# EAGLE board kostka-panel (EAGLE 9.2.2)
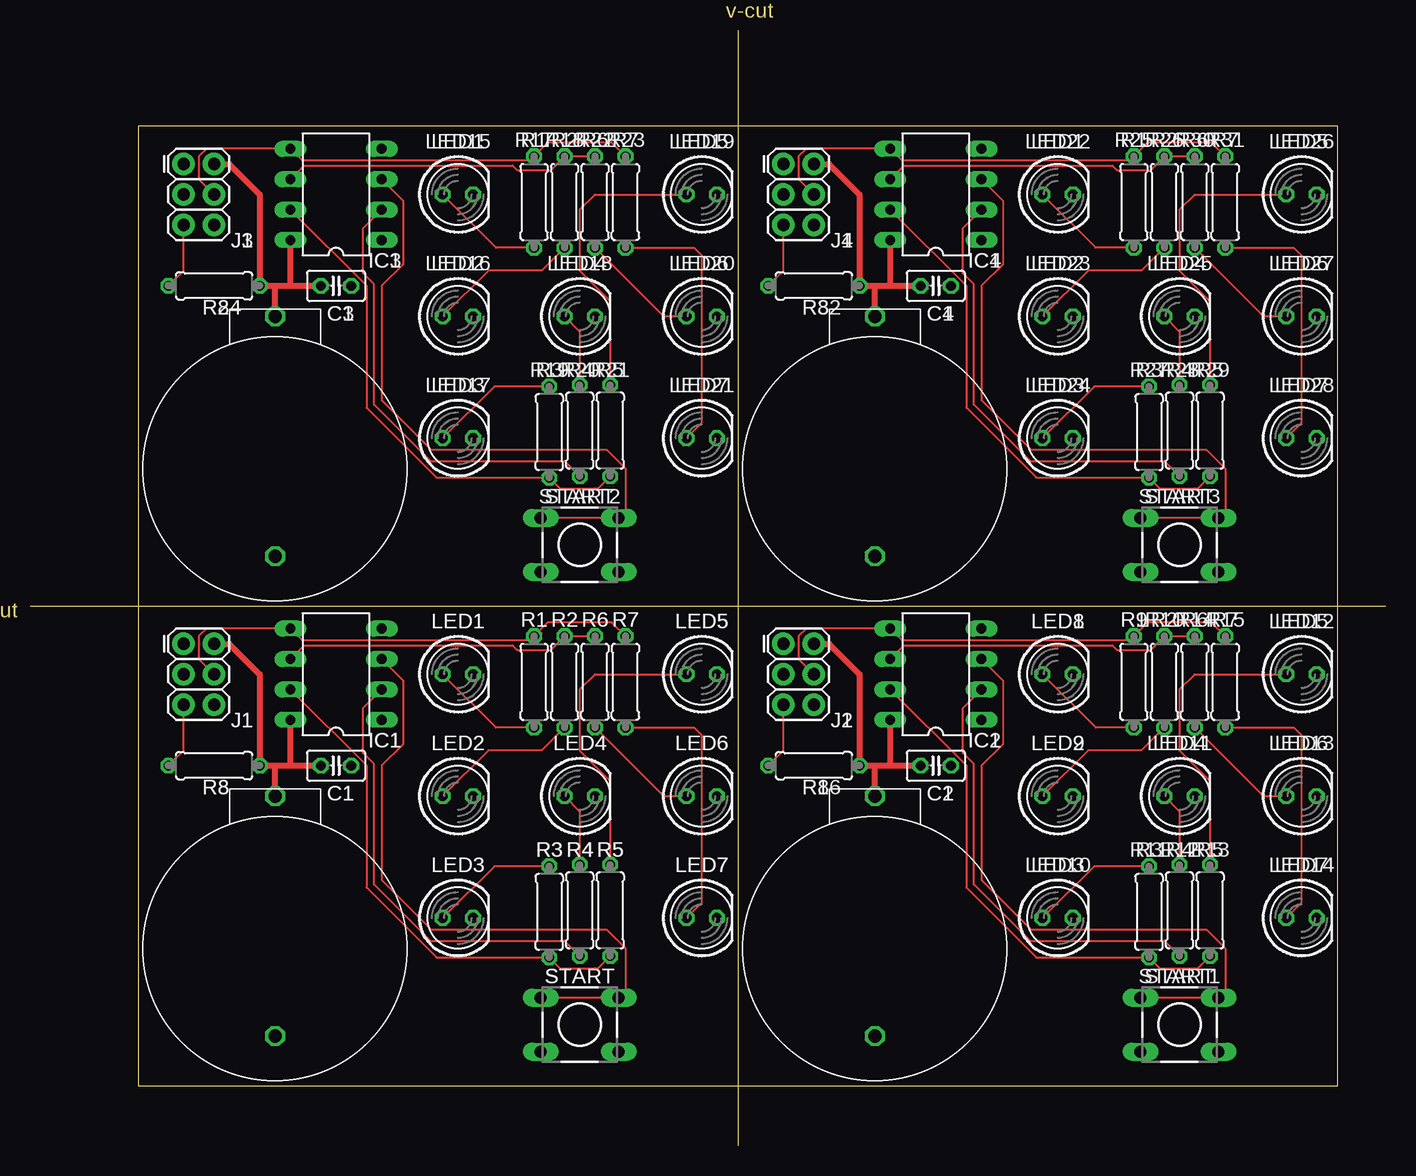
[diagram p0: board, top side]
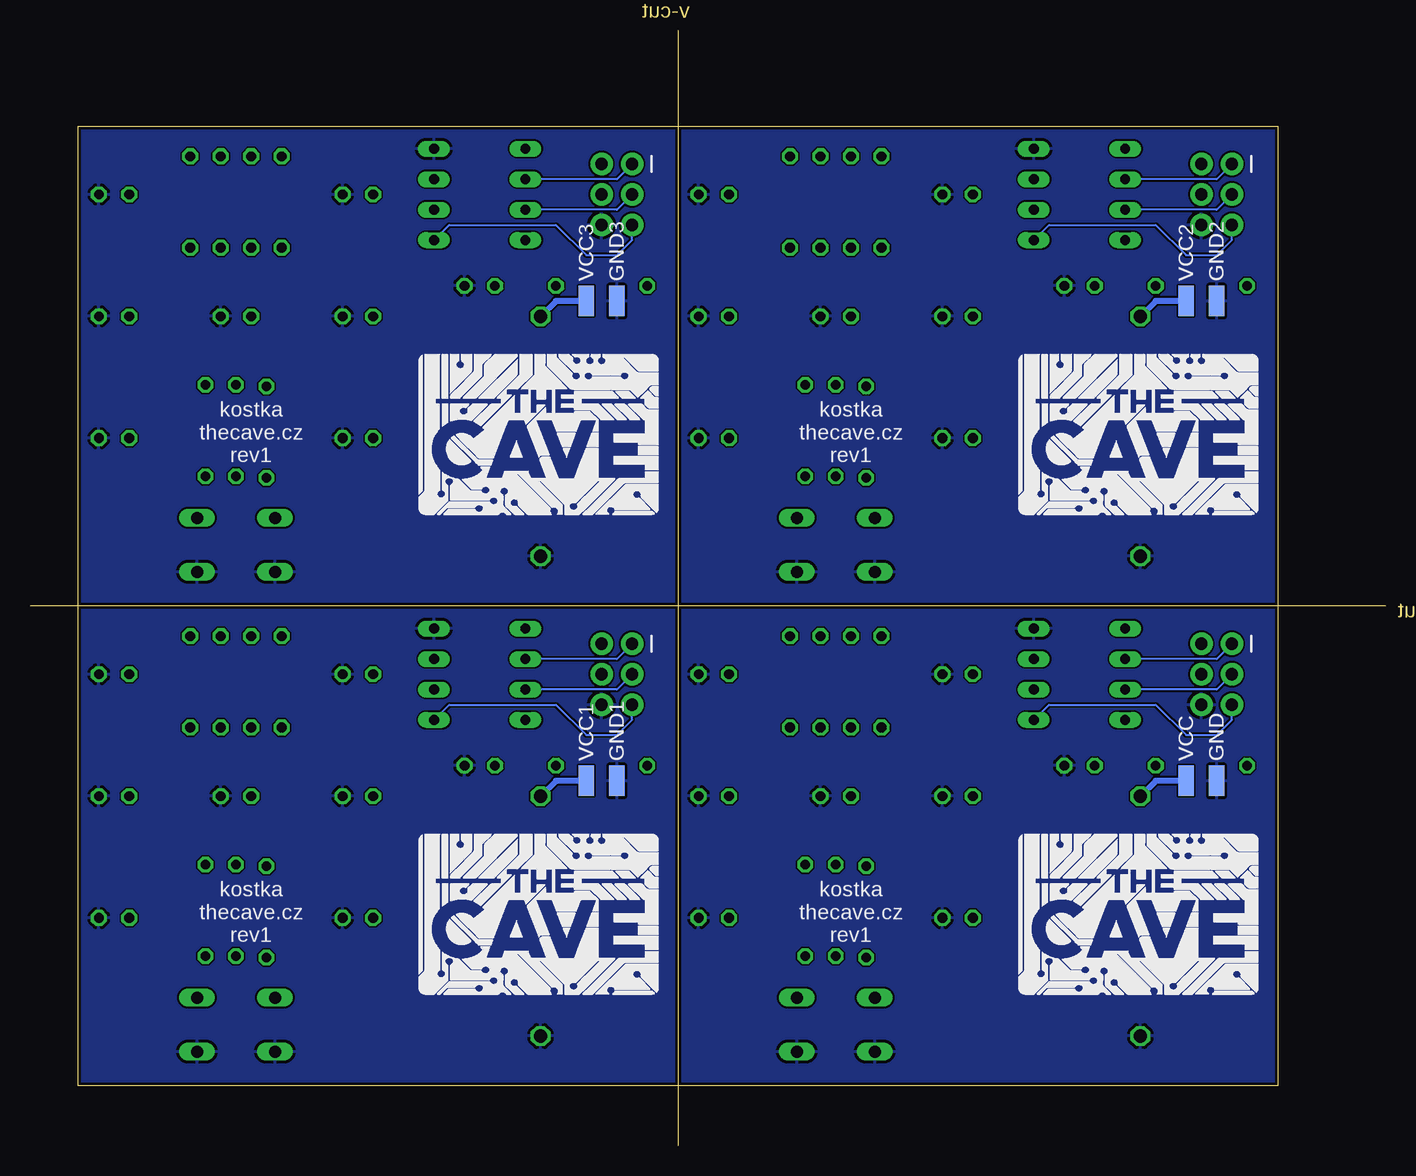
[diagram p1: board, bottom side, seen from below]

Size 113 x 93 mm. Coordinates in mm from the lower left corner, seen from the top.
Outline: 0,45 113,45
Outline: 59,93 59,0
Outline: 9,5 109,5 109,85 9,85 9,5
Copper layers (1*16): Top 0.035mm / dielectric 1.5mm / Bottom 0.035mm
Design rules "SeeedStudio_2layer_DRU_no_angle_20140221": minimum track width 6mil, minimum drill 12mil, track to track 6mil, track to pad 6mil, pad to pad 6mil, via to via 6mil, smd to smd 0mil, copper to edge 10mil, drill to drill 10mil, minimum pad ring 10mil, minimum via ring 6mil, stop-mask expansion 2mil, vias tented up to drill 100mil, thermal gap 10mil

## Footprints (pad centres in the part's own frame; a part is rotated, then mirrored left to right if it is on the bottom)
C025-025X050 = drill 0.813 octagon: 1 -1.27,0; 2 1.27,0
SMD1,27-2,54 = smd 1.27 x 2.54: 1 0,0
DIL08 = drill 0.813 long: 1 -3.81,-3.81; 2 -1.27,-3.81; 3 1.27,-3.81; 4 3.81,-3.81; 5 3.81,3.81; 6 1.27,3.81; 7 -1.27,3.81; 8 -3.81,3.81
2X3 = drill 1.016 pad 1.88: 1 0,0; 2 0,2.54; 3 2.54,0; 4 2.54,2.54; 5 5.08,0; 6 5.08,2.54
LED5MM = drill 0.813 octagon: A -1.27,0; K 1.27,0
0207/7 = drill 0.813 octagon: 1 -3.81,0; 2 3.81,0
DTS-6 = drill 1 long: 1 -3.25,2.25; 2 3.25,2.25; 3 -3.25,-2.25; 4 3.25,-2.25
CR2032HZ = drill 1.1 octagon: MINUS 0,7.3; PLUS 0,-12.7

## Placement (x,y rotation side)
C1  100n  [C025-025X050]  25.51,31.67 0 top
C2  100n  [C025-025X050]  75.51,31.67 0 top
C3  100n  [C025-025X050]  25.51,71.67 0 top
C4  100n  [C025-025X050]  75.51,71.67 0 top
GND  [SMD1,27-2,54]  14.08,30.4 0 bottom
GND1  [SMD1,27-2,54]  64.08,30.4 0 bottom
GND2  [SMD1,27-2,54]  14.08,70.4 0 bottom
GND3  [SMD1,27-2,54]  64.08,70.4 0 bottom
IC1  TINY13-20PU  [DIL08]  25.51,39.29 90 top
IC2  TINY13-20PU  [DIL08]  75.51,39.29 90 top
IC3  TINY13-20PU  [DIL08]  25.51,79.29 90 top
IC4  TINY13-20PU  [DIL08]  75.51,79.29 90 top
J1  AVR_SPI_PROG_3X2PTH  [2X3]  12.81,41.83 270 top
J2  AVR_SPI_PROG_3X2PTH  [2X3]  62.81,41.83 270 top
J3  AVR_SPI_PROG_3X2PTH  [2X3]  12.81,81.83 270 top
J4  AVR_SPI_PROG_3X2PTH  [2X3]  62.81,81.83 270 top
LED1  [LED5MM]  35.67,39.29 0 top
LED2  [LED5MM]  35.67,29.13 0 top
LED3  [LED5MM]  35.67,18.97 0 top
LED4  [LED5MM]  45.83,29.13 0 top
LED5  [LED5MM]  55.99,39.29 0 top
LED6  [LED5MM]  55.99,29.13 0 top
LED7  [LED5MM]  55.99,18.97 0 top
LED8  [LED5MM]  85.67,39.29 0 top
LED9  [LED5MM]  85.67,29.13 0 top
LED10  [LED5MM]  85.67,18.97 0 top
LED11  [LED5MM]  95.83,29.13 0 top
LED12  [LED5MM]  105.99,39.29 0 top
LED13  [LED5MM]  105.99,29.13 0 top
LED14  [LED5MM]  105.99,18.97 0 top
LED15  [LED5MM]  35.67,79.29 0 top
LED16  [LED5MM]  35.67,69.13 0 top
LED17  [LED5MM]  35.67,58.97 0 top
LED18  [LED5MM]  45.83,69.13 0 top
LED19  [LED5MM]  55.99,79.29 0 top
LED20  [LED5MM]  55.99,69.13 0 top
LED21  [LED5MM]  55.99,58.97 0 top
LED22  [LED5MM]  85.67,79.29 0 top
LED23  [LED5MM]  85.67,69.13 0 top
LED24  [LED5MM]  85.67,58.97 0 top
LED25  [LED5MM]  95.83,69.13 0 top
LED26  [LED5MM]  105.99,79.29 0 top
LED27  [LED5MM]  105.99,69.13 0 top
LED28  [LED5MM]  105.99,58.97 0 top
R1  1k  [0207/7]  42.02,38.66 270 top
R2  1k  [0207/7]  44.56,38.66 270 top
R3  1k  [0207/7]  43.29,19.48 90 top
R4  1k  [0207/7]  45.83,19.61 90 top
R5  1k  [0207/7]  48.37,19.61 90 top
R6  1k  [0207/7]  47.1,38.66 270 top
R7  1k  [0207/7]  49.64,38.66 270 top
R8  10k  [0207/7]  15.35,31.67 0 top
R9  1k  [0207/7]  92.02,38.66 270 top
R10  1k  [0207/7]  94.56,38.66 270 top
R11  1k  [0207/7]  93.29,19.48 90 top
R12  1k  [0207/7]  95.83,19.61 90 top
R13  1k  [0207/7]  98.37,19.61 90 top
R14  1k  [0207/7]  97.1,38.66 270 top
R15  1k  [0207/7]  99.64,38.66 270 top
R16  10k  [0207/7]  65.35,31.67 0 top
R17  1k  [0207/7]  42.02,78.66 270 top
R18  1k  [0207/7]  44.56,78.66 270 top
R19  1k  [0207/7]  43.29,59.48 90 top
R20  1k  [0207/7]  45.83,59.6 90 top
R21  1k  [0207/7]  48.37,59.6 90 top
R22  1k  [0207/7]  47.1,78.66 270 top
R23  1k  [0207/7]  49.64,78.66 270 top
R24  10k  [0207/7]  15.35,71.67 0 top
R25  1k  [0207/7]  92.02,78.66 270 top
R26  1k  [0207/7]  94.56,78.66 270 top
R27  1k  [0207/7]  93.29,59.48 90 top
R28  1k  [0207/7]  95.83,59.6 90 top
R29  1k  [0207/7]  98.37,59.6 90 top
R30  1k  [0207/7]  97.1,78.66 270 top
R31  1k  [0207/7]  99.64,78.66 270 top
R32  10k  [0207/7]  65.35,71.67 0 top
START  DTS-6  [DTS-6]  45.83,10.08 0 top
START1  DTS-6  [DTS-6]  95.83,10.08 0 top
START2  DTS-6  [DTS-6]  45.83,50.08 0 top
START3  DTS-6  [DTS-6]  95.83,50.08 0 top
U$1  THECAVE_LOGO_NEW_BOTTOM  [NEW_LOGO_BOTTOM]  10.27,12.62 0 top
U$2  THECAVE_LOGO_NEW_BOTTOM  [NEW_LOGO_BOTTOM]  60.27,12.62 0 top
U$3  THECAVE_LOGO_NEW_BOTTOM  [NEW_LOGO_BOTTOM]  10.27,52.62 0 top
U$4  THECAVE_LOGO_NEW_BOTTOM  [NEW_LOGO_BOTTOM]  60.27,52.62 0 top
VCC  [SMD1,27-2,54]  16.62,30.4 0 bottom
VCC1  [SMD1,27-2,54]  66.62,30.4 0 bottom
VCC2  [SMD1,27-2,54]  16.62,70.4 0 bottom
VCC3  [SMD1,27-2,54]  66.62,70.4 0 bottom
X1  CR2032H_HOLD2  [CR2032HZ]  20.43,16.43 180 top
X2  CR2032H_HOLD2  [CR2032HZ]  70.43,16.43 180 top
X3  CR2032H_HOLD2  [CR2032HZ]  20.43,56.43 180 top
X4  CR2032H_HOLD2  [CR2032HZ]  70.43,56.43 180 top

## Library data of the parts
C1-C4 = rcl; SPICEPREFIX: C
GND GND1-GND3 VCC VCC1-VCC3 = wirepad
IC1-IC4 = atmel; MPN: ATTINY13-20PU; OC_FARNELL: 9171550; OC_NEWARK: 96K6521
J1-J4 = SparkFun-Connectors
LED1-LED28 = led
R1-R32 = rcl; SPICEPREFIX: R
START START1-START3 = switch-tact
U$1-U$4 X1-X4 = thecave

## Nets
GND: C1.2 GND.1 IC1.4 J1.6 LED1.K LED2.K LED3.K LED4.K LED5.K LED6.K LED7.K START.3 START.4 X1.MINUS
GND1: C2.2 GND1.1 IC2.4 J2.6 LED8.K LED9.K LED10.K LED11.K LED12.K LED13.K LED14.K START1.3 START1.4 X2.MINUS
GND2: C3.2 GND2.1 IC3.4 J3.6 LED15.K LED16.K LED17.K LED18.K LED19.K LED20.K LED21.K START2.3 START2.4 X3.MINUS
GND3: C4.2 GND3.1 IC4.4 J4.6 LED22.K LED23.K LED24.K LED25.K LED26.K LED27.K LED28.K START3.3 START3.4 X4.MINUS
N$1: LED12.A R13.2
N$2: LED5.A R5.2
N$3: LED13.A R14.2
N$4: LED6.A R6.2
N$5: LED14.A R15.2
N$6: LED7.A R7.2
N$7: LED11.A R12.2
N$8: LED4.A R4.2
N$9: LED10.A R11.2
N$10: LED3.A R3.2
N$11: LED9.A R10.2
N$12: LED2.A R2.2
N$13: LED8.A R9.2
N$14: LED1.A R1.2
N$15: LED19.A R21.2
N$16: LED20.A R22.2
N$17: LED21.A R23.2
N$18: LED18.A R20.2
N$19: LED17.A R19.2
N$20: LED16.A R18.2
N$21: LED15.A R17.2
N$22: LED26.A R29.2
N$23: LED27.A R30.2
N$24: LED28.A R31.2
N$25: LED25.A R28.2
N$26: LED24.A R27.2
N$27: LED23.A R26.2
N$28: LED22.A R25.2
PB0: IC1.5 J1.4 R1.1 R7.1
PB1: IC1.6 J1.1 R2.1 R6.1
PB2: IC1.7 J1.3 R3.1 R5.1
PB3: IC1.2 R4.1
PB4: IC1.3 START.1 START.2
PB5: IC2.5 J2.4 R9.1 R15.1
PB6: IC2.6 J2.1 R10.1 R14.1
PB7: IC2.7 J2.3 R11.1 R13.1
PB8: IC2.2 R12.1
PB9: IC2.3 START1.1 START1.2
PB10: IC3.5 J3.4 R17.1 R23.1
PB11: IC3.6 J3.1 R18.1 R22.1
PB12: IC3.7 J3.3 R19.1 R21.1
PB13: IC3.2 R20.1
PB14: IC3.3 START2.1 START2.2
PB15: IC4.5 J4.4 R25.1 R31.1
PB16: IC4.6 J4.1 R26.1 R30.1
PB17: IC4.7 J4.3 R27.1 R29.1
PB18: IC4.2 R28.1
PB19: IC4.3 START3.1 START3.2
RST: IC1.1 J1.5 R8.1
RST1: IC2.1 J2.5 R16.1
RST2: IC3.1 J3.5 R24.1
RST3: IC4.1 J4.5 R32.1
VCC: C1.1 IC1.8 J1.2 R8.2 VCC.1 X1.PLUS
VCC1: C2.1 IC2.8 J2.2 R16.2 VCC1.1 X2.PLUS
VCC2: C3.1 IC3.8 J3.2 R24.2 VCC2.1 X3.PLUS
VCC3: C4.1 IC4.8 J4.2 R32.2 VCC3.1 X4.PLUS

## Tracks (layer width: path | path; a pad name or v marks a point on that pad's centre or on a via)
GND
  pour Bottom: 9,5 59.04,5 59.04,45.01 9,45.01
GND1
  pour Bottom: 59,5 109.04,5 109.04,45.01 59,45.01
GND2
  pour Bottom: 9,45 59.04,45 59.04,85 9,85
GND3
  pour Bottom: 59,45 109.04,45 109.04,85 59,85
N$1
  Top 0.152: R13.2 98.37,30.4 95.83,32.94 95.83,38.02 97.1,39.29 LED12.A
N$2
  Top 0.152: R5.2 48.37,30.4 45.83,32.94 45.83,38.02 47.1,39.29 LED5.A
N$3
  Top 0.152: R14.2 102.81,29.13 LED13.A
N$4
  Top 0.152: R6.2 52.81,29.13 LED6.A
N$5
  Top 0.152: LED14.A 105.99,20.24 105.99,34.21 105.36,34.84 R15.2
N$6
  Top 0.152: LED7.A 55.99,20.24 55.99,34.21 55.35,34.84 R7.2
N$7
  Top 0.152: LED11.A 95.83,27.86 R12.2
N$8
  Top 0.152: LED4.A 45.83,27.86 R4.2
N$9
  Top 0.152: R11.2 88.72,23.29 LED10.A
N$10
  Top 0.152: R3.2 38.72,23.29 LED3.A
N$11
  Top 0.152: LED9.A 88.21,32.94 92.66,32.94 R10.2
N$12
  Top 0.152: LED2.A 38.21,32.94 42.66,32.94 R2.2
N$13
  Top 0.152: R9.2 88.84,34.84 LED8.A
N$14
  Top 0.152: R1.2 38.84,34.84 LED1.A
N$15
  Top 0.152: R21.2 48.37,70.4 45.83,72.94 45.83,78.02 47.1,79.29 LED19.A
N$16
  Top 0.152: R22.2 52.81,69.13 LED20.A
N$17
  Top 0.152: LED21.A 55.99,60.24 55.99,74.21 55.35,74.84 R23.2
N$18
  Top 0.152: LED18.A 45.83,67.86 R20.2
N$19
  Top 0.152: R19.2 38.72,63.29 LED17.A
N$20
  Top 0.152: LED16.A 38.21,72.94 42.66,72.94 R18.2
N$21
  Top 0.152: R17.2 38.84,74.84 LED15.A
N$22
  Top 0.152: R29.2 98.37,70.4 95.83,72.94 95.83,78.02 97.1,79.29 LED26.A
N$23
  Top 0.152: R30.2 102.81,69.13 LED27.A
N$24
  Top 0.152: LED28.A 105.99,60.24 105.99,74.21 105.36,74.84 R31.2
N$25
  Top 0.152: LED25.A 95.83,67.86 R28.2
N$26
  Top 0.152: R27.2 88.72,63.29 LED24.A
N$27
  Top 0.152: LED23.A 88.21,72.94 92.66,72.94 R26.2
N$28
  Top 0.152: R25.2 88.84,74.84 LED22.A
PB0
  Top 0.152: J1.4 14.08,40.56 14.08,42.47 14.71,43.1 IC1.5 22.72,42.08 41.64,42.08 R1.1 43.16,43.61 48.5,43.61 R7.1
PB1
  Top 0.152: IC1.6 22.84,41.7 40.24,41.7 40.62,41.32 43.42,41.32 R2.1 R6.1
  Bottom 0.152: J1.1 14.08,40.56 IC1.6
PB2
  Top 0.152: IC1.7 28.05,31.67 28.05,21.51 33.89,15.67 R3.1 44.18,14.78 47.1,14.78 47.35,14.78 R5.1
  Bottom 0.152: J1.3 14.08,38.02 IC1.7
PB3
  Top 0.152: IC1.2 27.77,36.47 27.77,32.71 28.68,31.8 28.68,21.76 33.38,17.06 44.56,17.06 R4.1
PB4
  Top 0.152: IC1.3 31.1,38.78 31.1,33.45 29.32,31.67 29.32,22.14 33.45,18.02 48.05,18.02 49.64,16.43 49.64,12.62 49.37,12.62 START.2 START.1
PB5
  Top 0.152: J2.4 64.08,40.56 64.08,42.47 64.72,43.1 IC2.5 72.72,42.08 91.64,42.08 R9.1 93.16,43.61 98.5,43.61 R15.1
PB6
  Top 0.152: IC2.6 72.84,41.7 90.24,41.7 90.62,41.32 93.42,41.32 R10.1 R14.1
  Bottom 0.152: J2.1 64.08,40.56 IC2.6
PB7
  Top 0.152: IC2.7 78.05,31.67 78.05,21.51 83.89,15.67 R11.1 94.18,14.78 97.1,14.78 97.35,14.78 R13.1
  Bottom 0.152: J2.3 64.08,38.02 IC2.7
PB8
  Top 0.152: IC2.2 77.77,36.47 77.77,32.71 78.69,31.8 78.69,21.76 83.38,17.06 94.56,17.06 R12.1
PB9
  Top 0.152: IC2.3 81.1,38.78 81.1,33.45 79.32,31.67 79.32,22.14 83.45,18.02 98.05,18.02 99.64,16.43 99.64,12.62 99.37,12.62 START1.2 START1.1
PB10
  Top 0.152: J3.4 14.08,80.56 14.08,82.47 14.71,83.1 IC3.5 22.72,82.08 41.64,82.08 R17.1 43.16,83.61 48.5,83.61 R23.1
PB11
  Top 0.152: IC3.6 22.84,81.7 40.24,81.7 40.62,81.32 43.42,81.32 R18.1 R22.1
  Bottom 0.152: J3.1 14.08,80.56 IC3.6
PB12
  Top 0.152: IC3.7 28.05,71.67 28.05,61.51 33.89,55.67 R19.1 44.18,54.78 47.1,54.78 47.35,54.78 R21.1
  Bottom 0.152: J3.3 14.08,78.02 IC3.7
PB13
  Top 0.152: IC3.2 27.77,76.47 27.77,72.71 28.68,71.8 28.68,61.76 33.38,57.06 44.56,57.06 R20.1
PB14
  Top 0.152: IC3.3 31.1,78.78 31.1,73.45 29.32,71.67 29.32,62.15 33.45,58.02 48.05,58.02 49.64,56.43 49.64,52.62 49.37,52.62 START2.2 START2.1
PB15
  Top 0.152: J4.4 64.08,80.56 64.08,82.47 64.72,83.1 IC4.5 72.72,82.08 91.64,82.08 R25.1 93.16,83.61 98.5,83.61 R31.1
PB16
  Top 0.152: IC4.6 72.84,81.7 90.24,81.7 90.62,81.32 93.42,81.32 R26.1 R30.1
  Bottom 0.152: J4.1 64.08,80.56 IC4.6
PB17
  Top 0.152: IC4.7 78.05,71.67 78.05,61.51 83.89,55.67 R27.1 94.18,54.78 97.1,54.78 97.35,54.78 R29.1
  Bottom 0.152: J4.3 64.08,78.02 IC4.7
PB18
  Top 0.152: IC4.2 77.77,76.47 77.77,72.71 78.69,71.8 78.69,61.76 83.38,57.06 94.56,57.06 R28.1
PB19
  Top 0.152: IC4.3 81.1,78.78 81.1,73.45 79.32,71.67 79.32,62.15 83.45,58.02 98.05,58.02 99.64,56.43 99.64,52.62 99.37,52.62 START3.2 START3.1
RST
  Top 0.152: J1.5 12.81,32.94 R8.1
  Bottom 0.152: IC1.1 28.05,36.75 19.16,36.75 16.62,34.21 14.08,34.21 12.81,35.48 J1.5
RST1
  Top 0.152: J2.5 62.81,32.94 R16.1
  Bottom 0.152: IC2.1 78.05,36.75 69.16,36.75 66.62,34.21 64.08,34.21 62.81,35.48 J2.5
RST2
  Top 0.152: J3.5 12.81,72.94 R24.1
  Bottom 0.152: IC3.1 28.05,76.75 19.16,76.75 16.62,74.21 14.08,74.21 12.81,75.48 J3.5
RST3
  Top 0.152: J4.5 62.81,72.94 R32.1
  Bottom 0.152: IC4.1 78.05,76.75 69.16,76.75 66.62,74.21 64.08,74.21 62.81,75.48 J4.5
VCC
  Top 0.508: 20.43,31.67 R8.2 19.16,39.29 16.62,41.83 J1.2 | 20.43,31.67 21.7,31.67 | 21.7,31.67 C1.1 | X1.PLUS 20.43,31.67 | IC1.8 21.7,31.67
  Bottom 0.508: VCC.1 19.16,30.4 X1.PLUS
VCC1
  Top 0.508: 70.43,31.67 R16.2 69.16,39.29 66.62,41.83 J2.2 | 70.43,31.67 71.7,31.67 | 71.7,31.67 C2.1 | X2.PLUS 70.43,31.67 | IC2.8 71.7,31.67
  Bottom 0.508: VCC1.1 69.16,30.4 X2.PLUS
VCC2
  Top 0.508: 20.43,71.67 R24.2 19.16,79.29 16.62,81.83 J3.2 | 20.43,71.67 21.7,71.67 | 21.7,71.67 C3.1 | X3.PLUS 20.43,71.67 | IC3.8 21.7,71.67
  Bottom 0.508: VCC2.1 19.16,70.4 X3.PLUS
VCC3
  Top 0.508: 70.43,71.67 R32.2 69.16,79.29 66.62,81.83 J4.2 | 70.43,71.67 71.7,71.67 | 71.7,71.67 C4.1 | X4.PLUS 70.43,71.67 | IC4.8 71.7,71.67
  Bottom 0.508: VCC3.1 69.16,70.4 X4.PLUS

## Text on the board
Dimension: v-cut | v-cut
bPlace: kostka / thecave.cz / rev1 | kostka / thecave.cz / rev1 | kostka / thecave.cz / rev1 | kostka / thecave.cz / rev1
_tNames: LED1 | R1 | R2 | R6 | R7 | LED5 | LED1 | R1 | R2 | R6 | R7 | LED5 | J1 | J1 | IC1 | IC1 | LED2 | LED4 | LED6 | LED2 | LED4 | LED6 | R8 | C1 | R8 | C1 | R3 | R4 | R5 | R3 | R4 | R5 | LED3 | LED7 | LED3 | LED7 | START | START | LED1 | R1 | R2 | R6 | R7 | LED5 | LED1 | R1 | R2 | R6 | R7 | LED5 | J1 | J1 | IC1 | IC1 | LED2 | LED4 | LED6 | LED2 | LED4 | LED6 | R8 | C1 | R8 | C1 | R3 | R4 | R5 | R3 | R4 | R5 | LED3 | LED7 | LED3 | LED7 | START | START
_bNames: GND | VCC | GND | VCC | GND | VCC | GND | VCC